# Altium PCB RP2040.PcbDoc
Units mm, origin at the board's own origin, x right, y up, seen from the top; angles counter-clockwise.
Board outline 51.3 x 56.73 mm, 4 copper layers (Top Layer, Layer 1, Layer 2, Bottom Layer), stack 1.587 mm thick; 30 components, 51 nets, 206 pads, 53 vias.
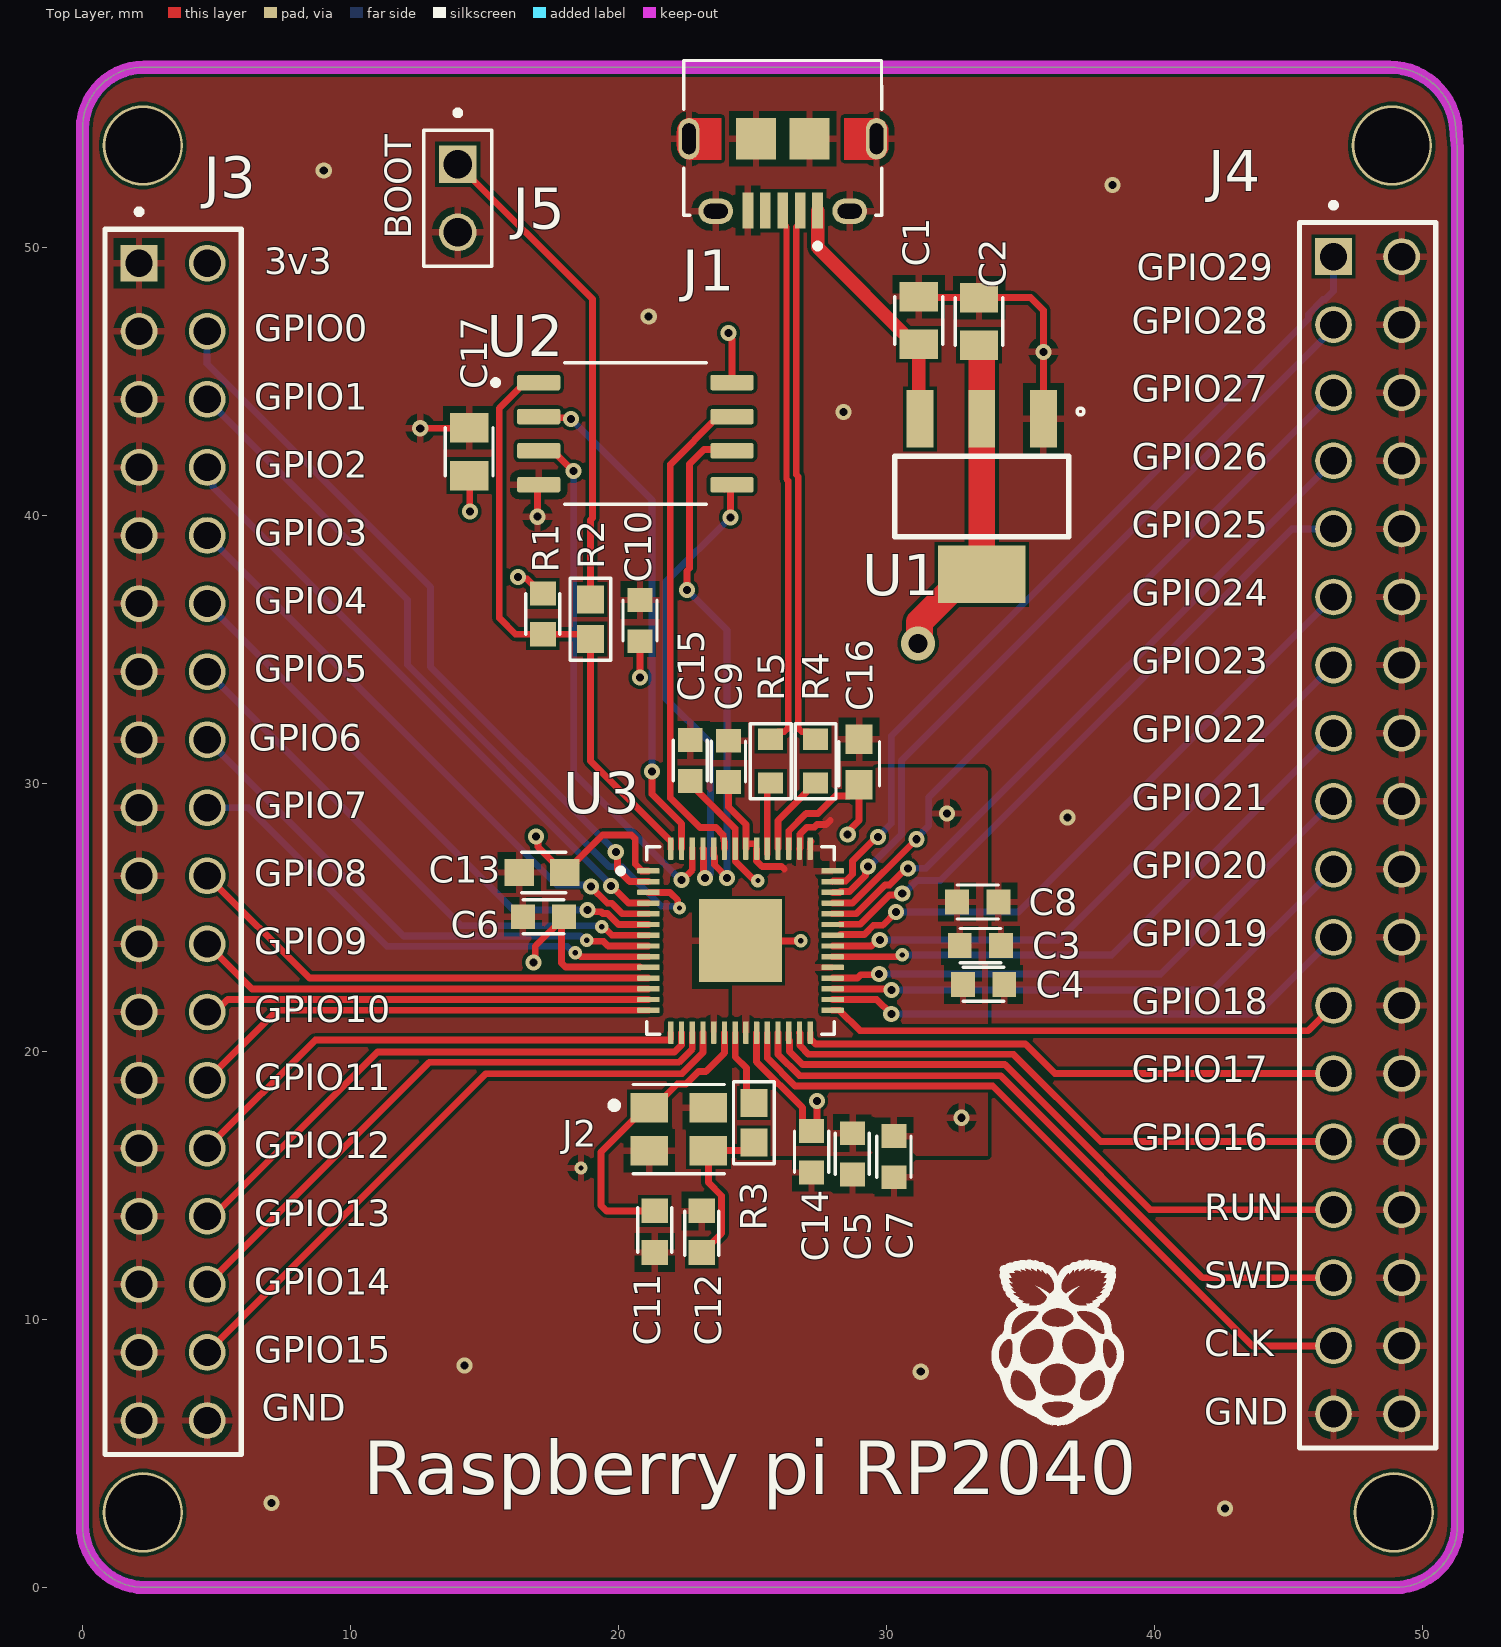
[diagram p0: Top Layer view]
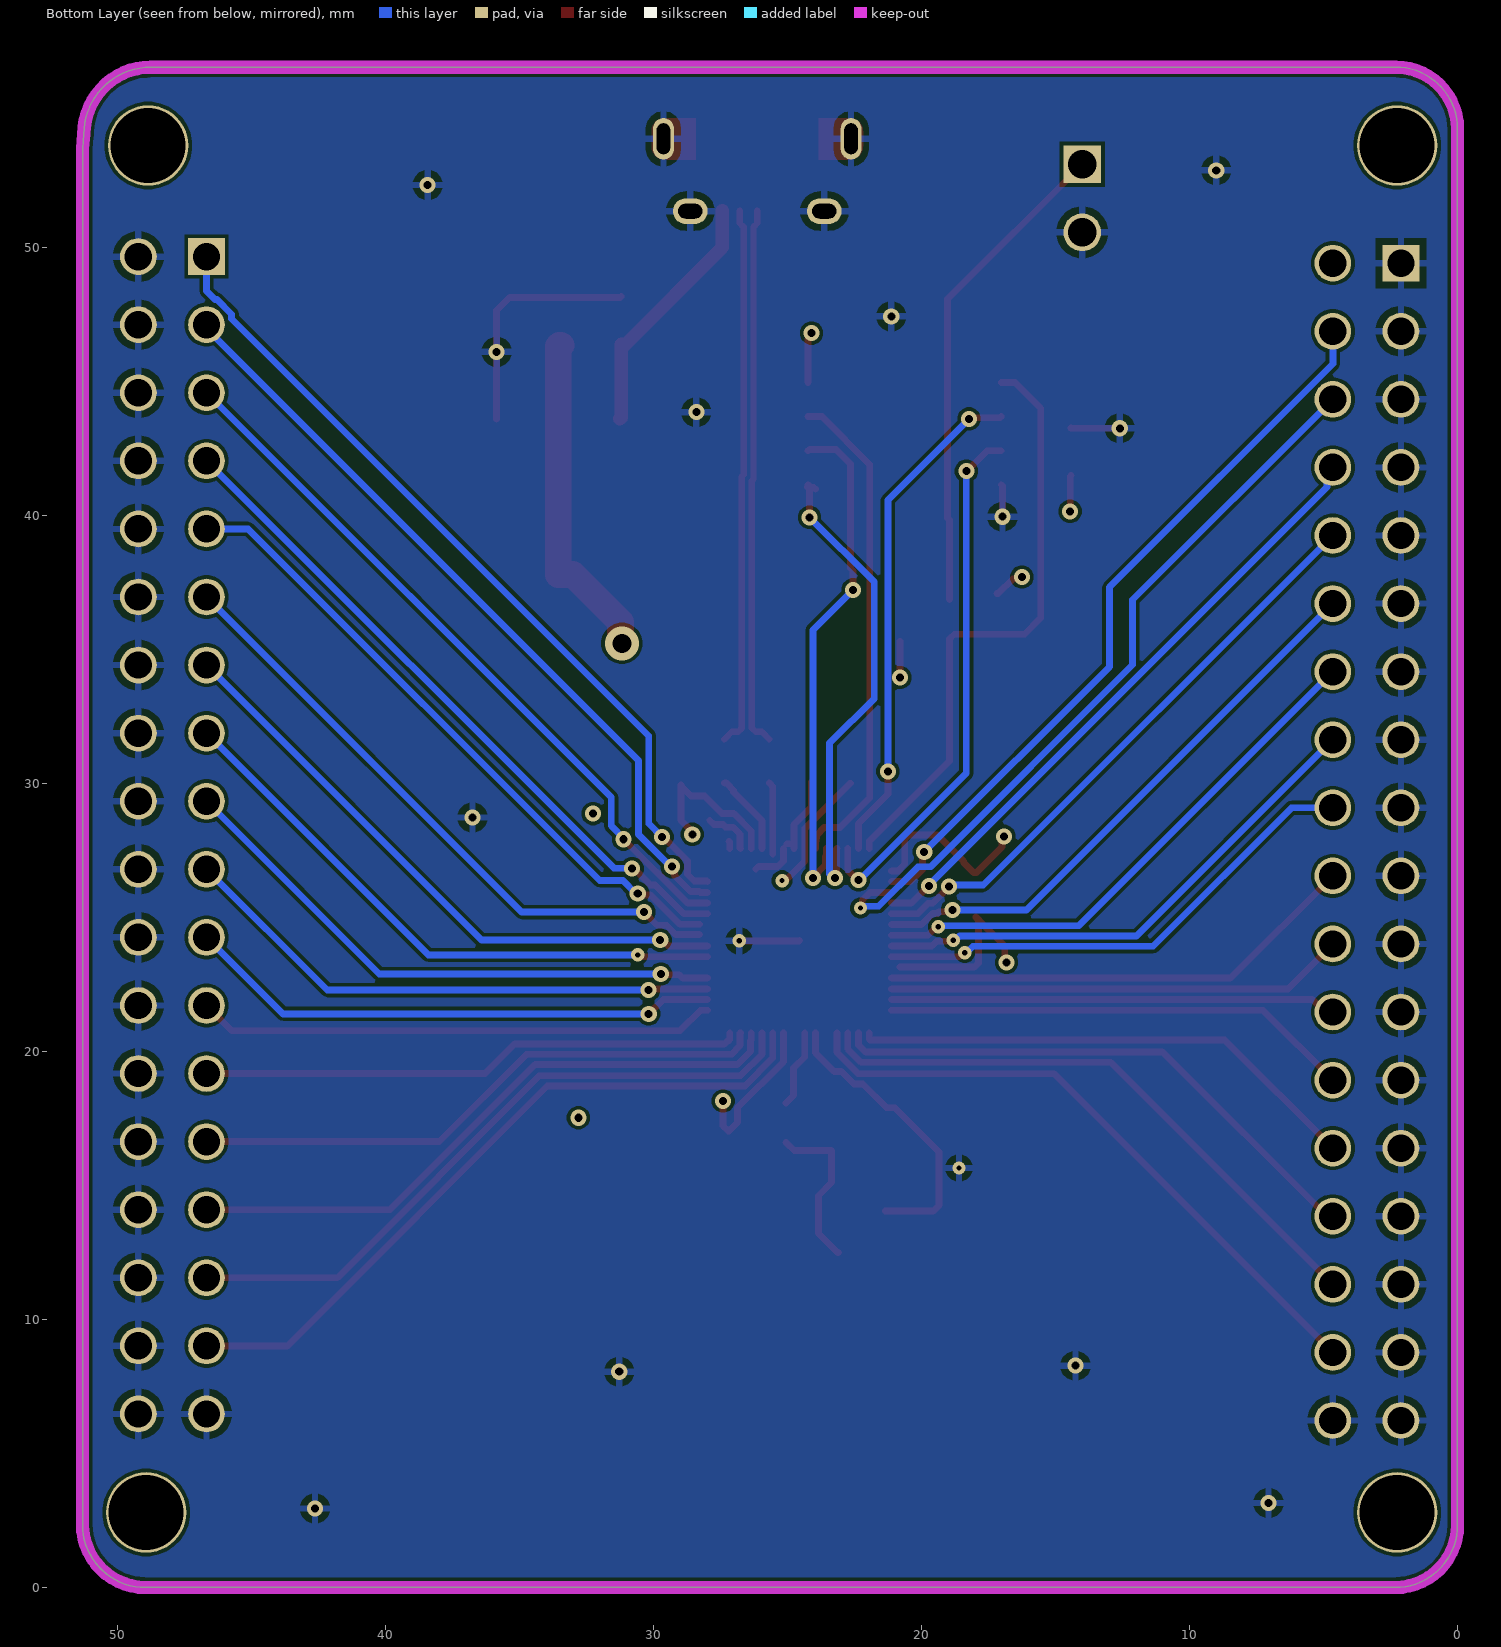
[diagram p1: Bottom Layer view, seen from below]
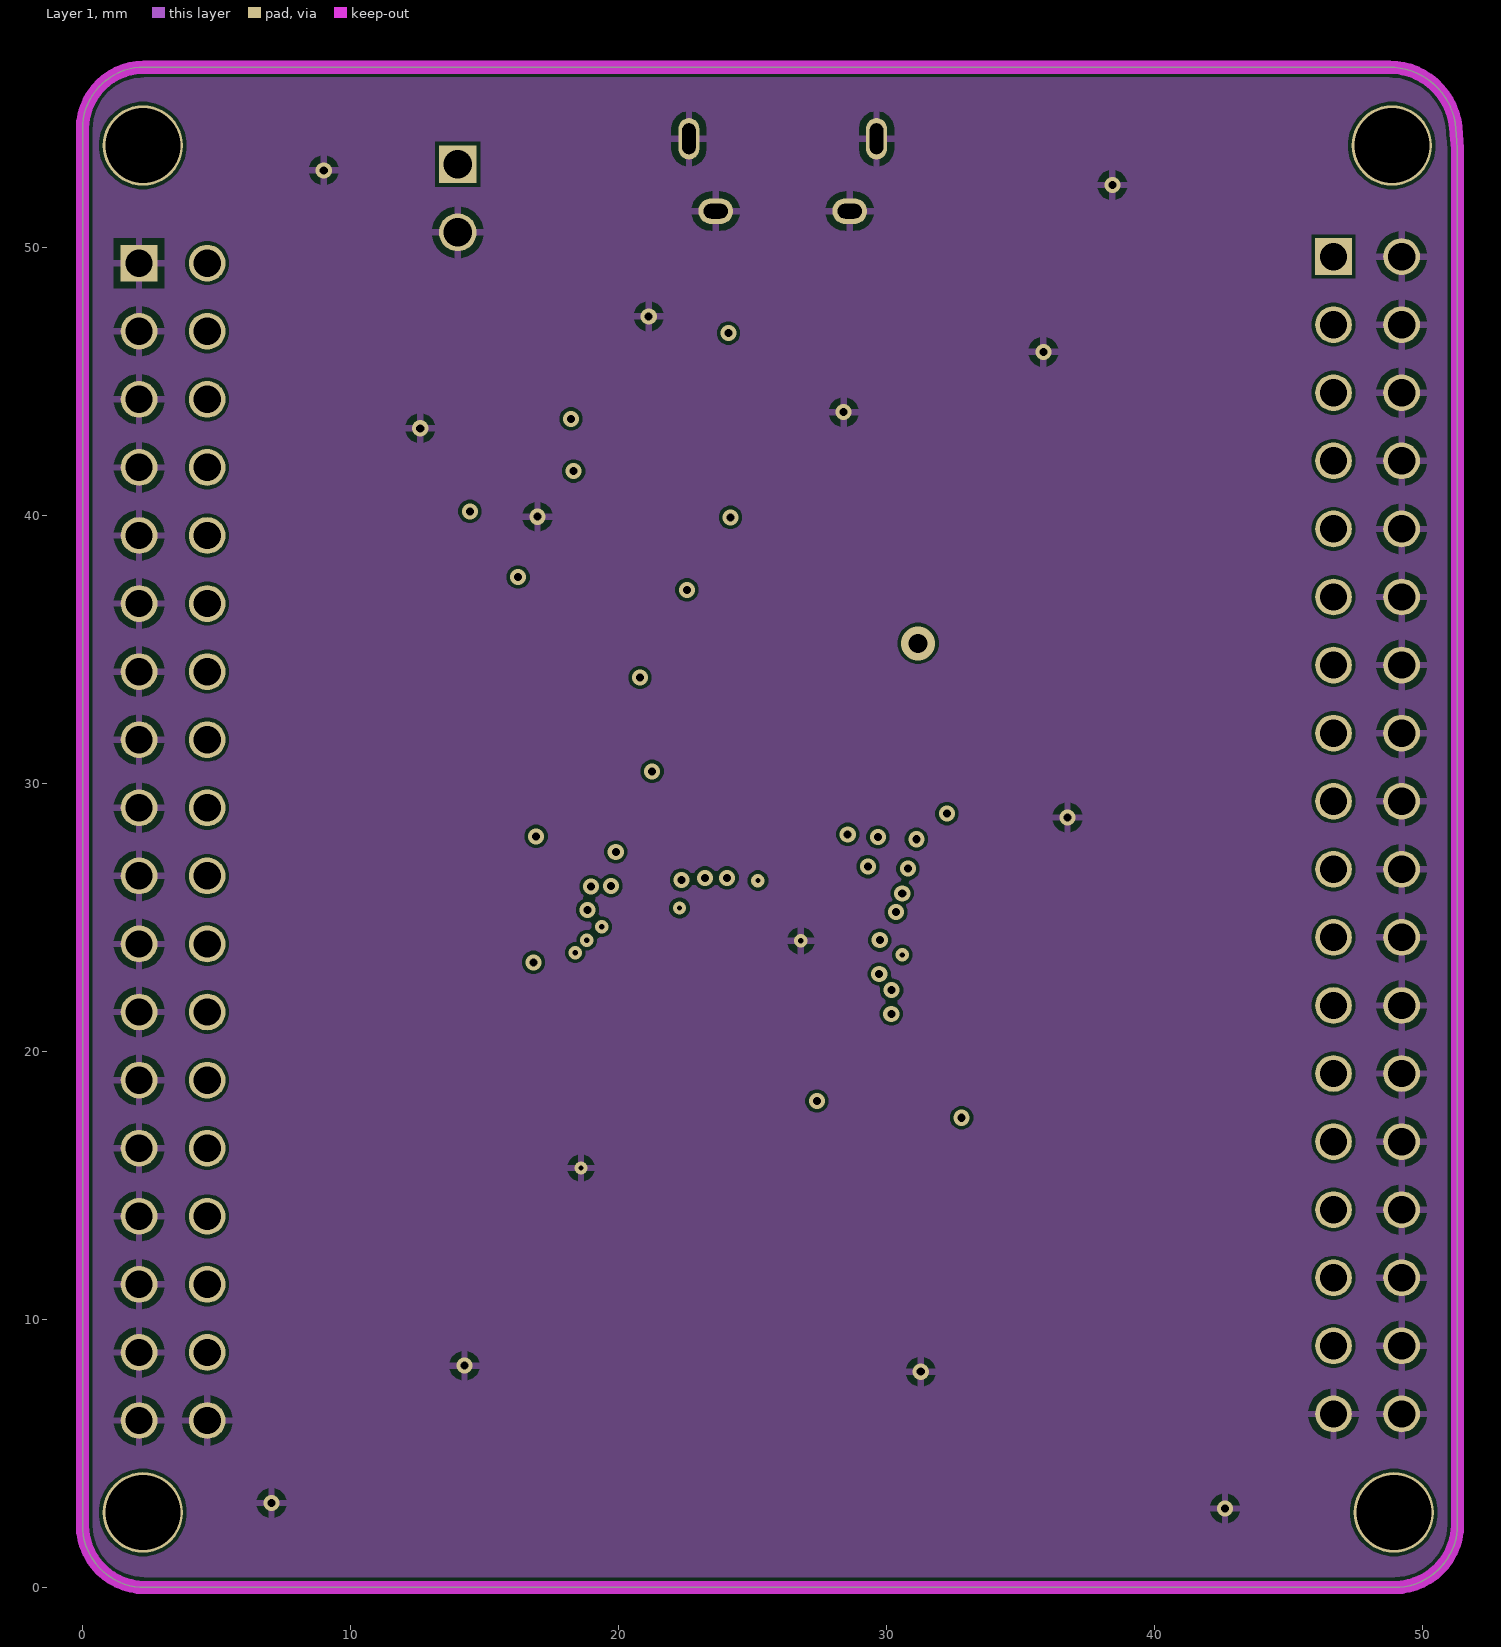
[diagram p2: Layer 1]
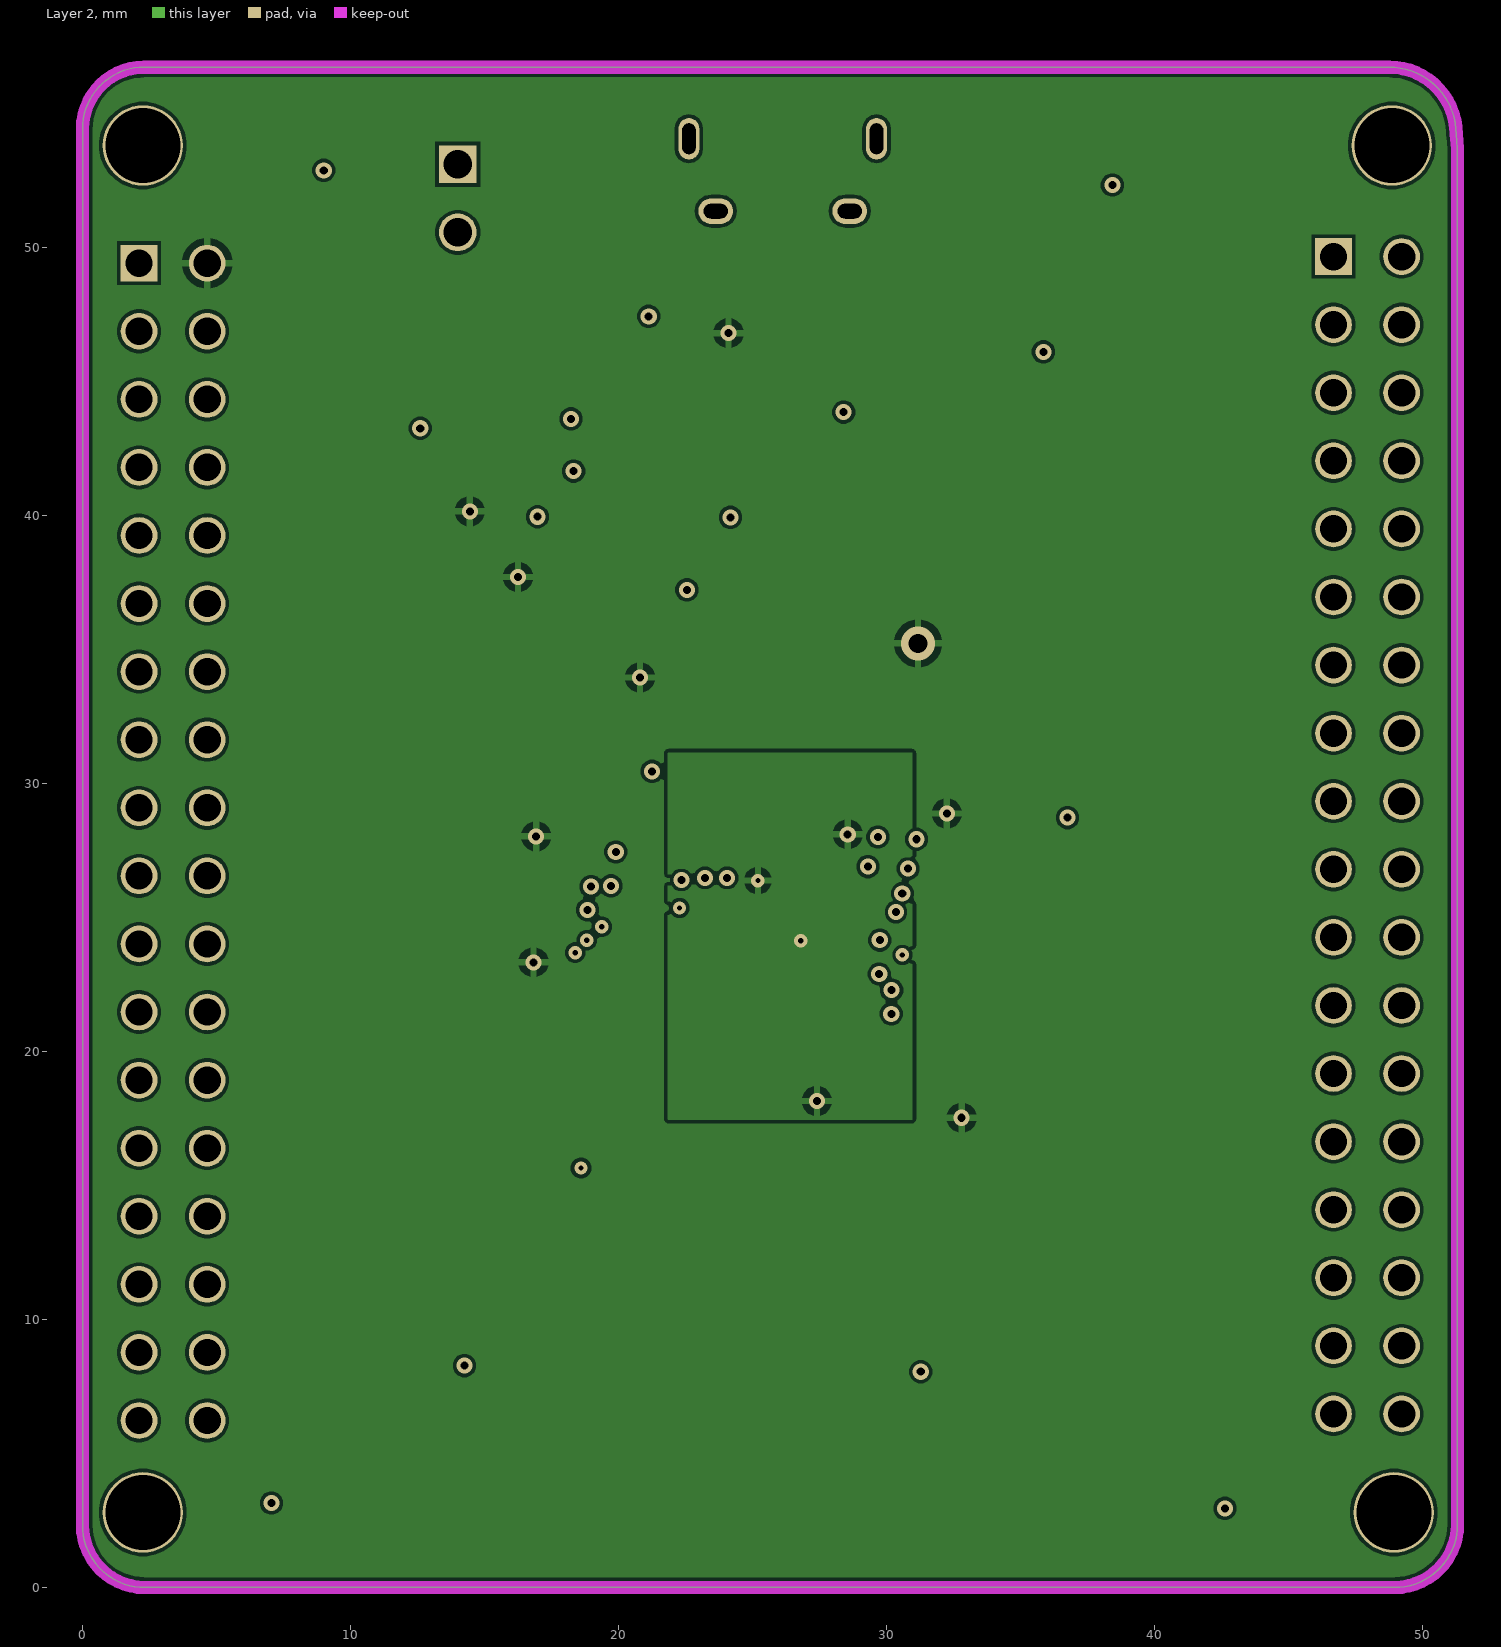
[diagram p3: Layer 2]
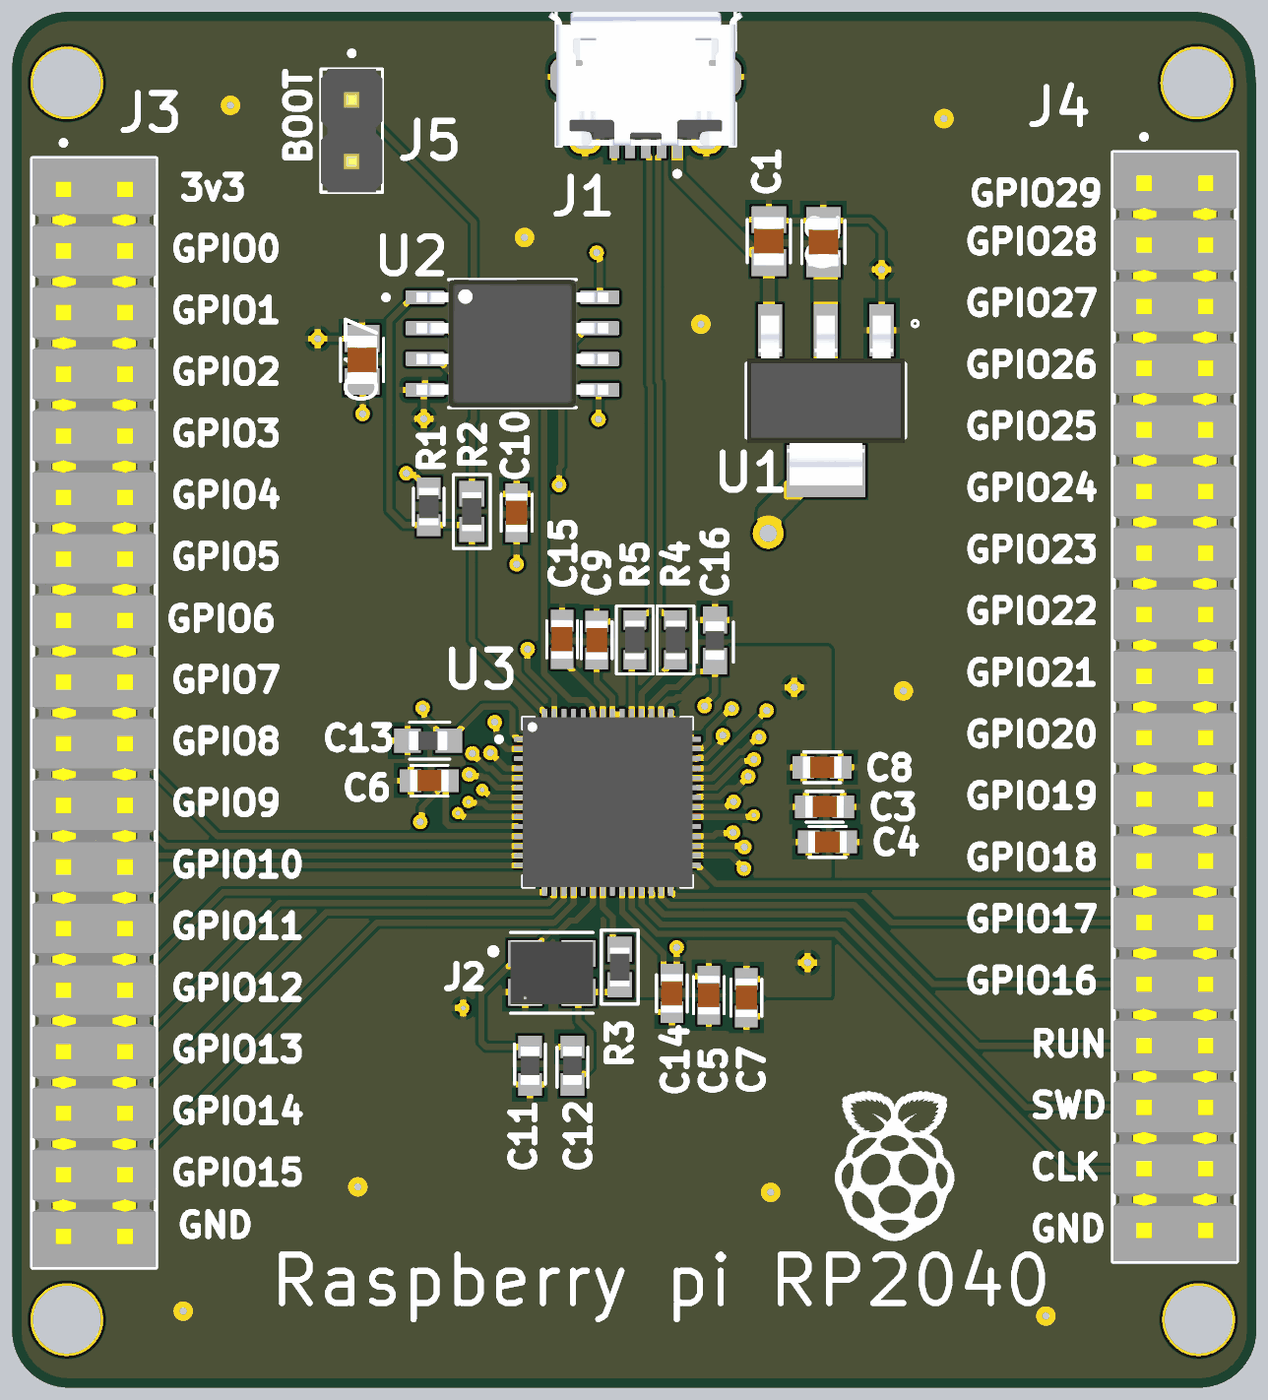
[diagram p4: 3D render of the assembled board from above, using the file's embedded part models]

## Layer stack, top to bottom
Top Solder: solder mask 0.0102, Solder Resist, Dk 3.5
Top Layer: signal copper 0.0356
Dielectric 2: prepreg 0.2104, PP-023, Dk 4.4
Layer 1: signal copper 0.0152
Dielectric 1: dielectric 1.065, FR-4, Dk 4.6
Layer 2: signal copper 0.0152
Dielectric 3: prepreg 0.2104, PP-023, Dk 4.4
Bottom Layer: signal copper 0.0356
Bottom Solder: solder mask 0.0102, Solder Resist, Dk 3.5

## Board outline
51.3,2.825 51.3,2.35 cw(c48.95,2.35) 48.95,0 2.325,0 cw(c2.325,2.325) 0,2.325 0,2.9 0,53.95 0,54.425 cw(c2.3,54.425) 2.3,56.725 48.75,56.725 cw(c48.75,54.225) 51.25,54.225 51.3,53.7

## Design rules (kind name [scope] priority, off if disabled: settings)
Clearance [All] p1: gap=0.127 ignorepadtopadclearanceinfootprint=TRUE
DiffPairsRouting UDiff [InDifferentialPairClass('UDiff')] p1: maxlimit=0.127 minlimit=0.127 mostfreqgap=0.127 toplayer_minwidth=0.242 toplayer_maxwidth=0.242 toplayer_prefwidth=0.242 midlayer1_minwidth=0.154 midlayer1_maxwidth=0.154 midlayer1_prefwidth=0.154 midlayer2_minwidth=0.154 midlayer2_maxwidth=0.154 midlayer2_prefwidth=0.154 bottomlayer_minwidth=0.242 bottomlayer_maxwidth=0.242 bottomlayer_prefwidth=0.242 impedanceprofiledriven=TRUE impedanceprofileid={4DA9A289-3666-44F6-A11D-1AFC5466B2C4} impedanceprofilevalue=90.000000 maxuncoupledlength=12.7
DiffPairsRouting Diff90 [InDifferentialPairClass('Diff90')] p2: maxlimit=0.127 minlimit=0.127 mostfreqgap=0.127 toplayer_minwidth=0.242 toplayer_maxwidth=0.242 toplayer_prefwidth=0.242 bottomlayer_minwidth=0.242 bottomlayer_maxwidth=0.242 bottomlayer_prefwidth=0.242 impedanceprofiledriven=TRUE impedanceprofileid={9129FA07-BEEB-4B5A-855E-41EE754037DE} impedanceprofilevalue=90.000000 maxuncoupledlength=12.7
PolygonConnect [All] p1: connectstyle=Relief reliefconductorwidth=0.254 reliefentries=4 polygonreliefangle="90 Angle" airgapwidth=0.254
RoutingVias [All] p1: holewidth=0.3 width=0.6 viastyle="Through Hole" minholewidth=0.15 minwidth=0.5 maxholewidth=0.711 maxwidth=1.27
SolderMaskExpansion [All] p1: expansion=0.102 istentingtop=FALSE
Width [All] p1: maxlimit=1 minlimit=0.254 preferedwidth=0.254 midlayer1_maxwidth=0.254 midlayer2_maxwidth=0.254 bottomlayer_maxwidth=0.254 minimp=50.000000 maximp=50.000000 favimp=50.000000
29 further rules are at their usual default settings.

## Classes and differential pairs
differential pair class Diff90: D
component class Power_USB: C1 C2 C3 C4 C5 C6 C7 C8 C9 C17 J1 U1
component class MCU: C13 C14 C15 C16 R4 R5 U3
component class "Flash Storage": C10 R1 R2 U2
component class "Crystal Oscillator": C11 C12 J2 R3
component class Conectors: J3 J4 J5
differential pair UD: +UD_P -UD_N
differential pair D: +D_P -D_N

## Components (designator, comment, footprint, x,y, rotation, side; value= is the part's Value field where it differs from the comment)
C1 "10uF" CL21A106KOQNNNG 31.2,47.275 r270 top
C2 "10uF" CL21A106KOQNNNG 33.45,47.237 r270 top
C3 "100nF" CL10B104KB8NNNC 33.5,23.95 r180 top
C4 "100nF" CL10B104KB8NNNC 33.62,22.5 r180 top
C5 "100nF" CL10B104KB8NNNC 28.725,16.18 r90 top
C6 "100nF" CL10B104KB8NNNC 17.2,25.025 r0 top
C7 "100nF" CL10B104KB8NNNC 30.275,16.075 r90 top
C8 "100nF" CL10B104KB8NNNC 33.4,25.575 r180 top
C9 "100nF" CL10B104KB8NNNC 24.1,30.82 r270 top
C10 "100nF" CL10B104KB8NNNC 20.8,36.075 r90 top
C11 "15pF" CC0603JRNPO9BN150 21.35,13.275 r270 top
C12 "15pF" CC0603JRNPO9BN150 23.1,13.275 r90 top
C13 "1uF" CC0603KRX5R8BB105 17.15,26.675 r180 top
C14 "100nF" CL10B104KB8NNNC 27.2,16.255 r90 top
C15 "100nF" CL10B104KB8NNNC 22.675,30.855 r270 top
C16 "1uF" CC0603KRX5R8BB105 28.975,30.8 r90 top
C17 "10uF" CL21A106KOQNNNG 14.425,42.375 r270 top
J1 "usb" AMPHENOL_10118194-0001LF 26.125,54.05 r180 top
J2 "Crystal" ABM8-272-T3 22.25,17.1 r0 top
J3 "pin header" MTSW-118-07-T-D-150 2.11,49.41 r270 top
J4 "pin header" MTSW-118-07-T-D-150 46.675,49.655 r270 top
J5 "THS-02-R" THS-02-R 14,51.83 r270 top
R1 "10k" RMCF0603JT10K0 17.175,36.325 r90 top
R2 "1k" RC0603FR-071KL 18.95,36.125 r270 top
R3 "1k" RC0603FR-071KL 25.05,17.34 r90 top
R4 "27R4" RC0603FR-0727R4L 27.35,30.83 r90 top
R5 "27R4" RC0603FR-0727R4L 25.675,30.83 r90 top
U1 "Regulator" SOT230P700X180-4N 33.55,40.7 r270 top
U2 "flash memory" SOIC127P790X216-8N 20.625,43.05 r0 top
U3 "RP2040" RP2040 24.55,24.135 r0 top

## Footprints (in the part's own frame and the unit in brackets; to place one, negate y for a bottom-side part, rotate by r counter-clockwise, add the part's x,y. Pads: shape width x height; smd on the part's side, far side on the other; paste and mask are expansions set on the pad)
ABM8-272-T3 [mm]
  rect 1.4x1.1 smd: 1(-1.1,0.8) 2(-1.1,-0.8) 3(1.1,-0.8) 4(1.1,0.8)
  silkscreen extent -2.54,-1.66 1.7,1.66, body extent -1.7,-1.35 1.7,1.35, height 0.76
AMPHENOL_10118194-0001LF [mm]
  rect 0.4x1.35 smd: 1(-1.3,2.675) 2(-0.65,2.675) 3(0,2.675) 4(0.65,2.675) 5(1.3,2.675)
  oval 0.775x1.55 hole 0.5 slot 1.15 at 90 deg mask+0: SH1(-3.5,0) SH4(3.5,0)
  rect 1.5x1.55 smd: SH2(1,0) SH3(-1,0)
  oval 1.3x0.95 hole 0.55 slot 0.9 at 0 deg: SH5(-2.5,2.7) SH6(2.5,2.7)
  Top Layer region: 3.471,0.774 3.497,0.772 3.523,0.769 3.549,0.764 3.574,0.758 3.6,0.751 3.624,0.742 3.648,0.732 3.672,0.721 3.695,0.708 3.717,0.694 3.739,0.68 3.76,0.664 3.78,0.647 3.799,0.629 3.817,0.61 3.834,0.59 3.85,0.569 3.864,0.547 3.878,0.525 3.891,0.502 3.902,0.478 3.912,0.454 3.921,0.43 3.928,0.404 3.934,0.379 3.939,0.353 3.942,0.327 3.944,0.301 3.945,0.275 3.945,-0.275 3.944,-0.301 3.942,-0.327 3.939,-0.353 3.934,-0.379 3.928,-0.404 3.921,-0.43 3.912,-0.454 3.902,-0.478 3.891,-0.502 3.878,-0.525 3.864,-0.547 3.85,-0.569 3.834,-0.59 3.817,-0.61 3.799,-0.629 3.78,-0.647 3.76,-0.664 3.739,-0.68 3.717,-0.694 3.695,-0.708 3.672,-0.721 3.648,-0.732 3.624,-0.742 3.6,-0.751 3.574,-0.758 3.549,-0.764 3.523,-0.769 3.497,-0.772 3.471,-0.774 3.445,-0.775 2.3,-0.775 2.3,0.775 3.445,0.775
  Top Layer region: -2.3,-0.775 -3.445,-0.775 -3.471,-0.774 -3.497,-0.772 -3.523,-0.769 -3.549,-0.764 -3.574,-0.758 -3.6,-0.751 -3.624,-0.742 -3.648,-0.732 -3.672,-0.721 -3.695,-0.708 -3.717,-0.694 -3.739,-0.68 -3.76,-0.664 -3.78,-0.647 -3.799,-0.629 -3.817,-0.61 -3.834,-0.59 -3.85,-0.569 -3.864,-0.547 -3.878,-0.525 -3.891,-0.502 -3.902,-0.478 -3.912,-0.454 -3.921,-0.43 -3.928,-0.404 -3.934,-0.379 -3.939,-0.353 -3.942,-0.327 -3.944,-0.301 -3.945,-0.275 -3.945,0.275 -3.944,0.301 -3.942,0.327 -3.939,0.353 -3.934,0.379 -3.928,0.404 -3.921,0.43 -3.912,0.454 -3.902,0.478 -3.891,0.502 -3.878,0.525 -3.864,0.547 -3.85,0.569 -3.834,0.59 -3.817,0.61 -3.799,0.629 -3.78,0.647 -3.76,0.664 -3.739,0.68 -3.717,0.694 -3.695,0.708 -3.672,0.721 -3.648,0.732 -3.624,0.742 -3.6,0.751 -3.574,0.758 -3.549,0.764 -3.523,0.769 -3.497,0.772 -3.471,0.774 -3.445,0.775 -2.3,0.775
  silkscreen extent -3.7,-2.92 3.7,4.1, body extent -4.02,-2.68 4.03,2.85, height 2.73
CC0603JRNPO9BN150 [mm]
  rect 0.92x0.98 smd: 1(-0.775,0) 2(0.775,0)
  silkscreen extent -0.89,-0.64 0.76,0.64, body extent -0.8,-0.4 0.8,0.4, height 0.9
CC0603KRX5R8BB105 [mm]
  rect 1.1x1 smd: 1(-0.85,0) 2(0.85,0)
  silkscreen extent -0.89,-0.76 0.76,0.76, body extent -0.8,-0.4 0.8,0.4, height 0.9
CL10B104KB8NNNC [mm]
  rect 0.89x0.93 smd: 1(-0.77,0) 2(0.77,0)
  silkscreen extent -0.76,-0.64 0.76,0.64, body extent -0.8,-0.45 0.8,0.45, height 0.78
CL21A106KOQNNNG [mm]
  rect 1.1x1.43 smd: 1(-0.888,0) 2(0.888,0)
  silkscreen extent -0.89,-0.89 0.89,0.89, body extent -1,-0.62 1,0.63, height 1.35
MTSW-118-07-T-D-150 [mm]
  rect 1.37x1.37 hole 1.02: 01(0,0)
  round 1.37 hole 1.02: 02(0,2.54) 03(2.54,0) 04(2.54,2.54) 05(5.08,0) 06(5.08,2.54) 07(7.62,0) 08(7.62,2.54) 09(10.16,0) 10(10.16,2.54) 11(12.7,0) 12(12.7,2.54) 13(15.24,0) 14(15.24,2.54) 15(17.78,0) 16(17.78,2.54) 17(20.32,0) 18(20.32,2.54) 19(22.86,0) 20(22.86,2.54) 21(25.4,0) 22(25.4,2.54) 23(27.94,0) 24(27.94,2.54) 25(30.48,0) 26(30.48,2.54) 27(33.02,0) 28(33.02,2.54) 29(35.56,0) 30(35.56,2.54) 31(38.1,0) 32(38.1,2.54) 33(40.64,0) 34(40.64,2.54) 35(43.18,0) 36(43.18,2.54)
  silkscreen extent -2.02,-1.27 44.45,3.81, body extent -1.27,-1.27 44.45,3.81, height 7.11
RC0603FR-071KL [mm]
  rect 1.04x1.02 smd: 1(-0.735,0) 2(0.735,0)
  silkscreen extent -1.52,-0.76 1.52,0.76, body extent -0.8,-0.4 0.8,0.4, height 0.55
RC0603FR-0727R4L [mm]
  rect 0.79x0.93 smd: 1(-0.82,0) 2(0.82,0)
  silkscreen extent -1.4,-0.76 1.4,0.76, body extent -0.8,-0.4 0.8,0.4, height 0.45
RMCF0603JT10K0 [mm]
  rect 0.9x0.97 smd: 1(-0.76,0) 2(0.76,0)
  silkscreen extent -0.76,-0.64 0.76,0.64, body extent -0.77,-0.4 0.78,0.4, height 0.55
RP2040 [mm]
  rrect25% 0.84x0.2 smd: 1(-3.435,2.6) 2(-3.435,2.2) 3(-3.435,1.8) 4(-3.435,1.4) 5(-3.435,1) 6(-3.435,0.6) 7(-3.435,0.2) 8(-3.435,-0.2) 9(-3.435,-0.6) 10(-3.435,-1) 11(-3.435,-1.4) 12(-3.435,-1.8) 13(-3.435,-2.2) 14(-3.435,-2.6) 29(3.435,-2.6) 30(3.435,-2.2) 31(3.435,-1.8) 32(3.435,-1.4) 33(3.435,-1) 34(3.435,-0.6) 35(3.435,-0.2) 36(3.435,0.2) 37(3.435,0.6) 38(3.435,1) 39(3.435,1.4) 40(3.435,1.8) 41(3.435,2.2) 42(3.435,2.6)
  rrect25% 0.2x0.84 smd: 15(-2.6,-3.435) 16(-2.2,-3.435) 17(-1.8,-3.435) 18(-1.4,-3.435) 19(-1,-3.435) 20(-0.6,-3.435) 21(-0.2,-3.435) 22(0.2,-3.435) 23(0.6,-3.435) 24(1,-3.435) 25(1.4,-3.435) 26(1.8,-3.435) 27(2.2,-3.435) 28(2.6,-3.435) 43(2.6,3.435) 44(2.2,3.435) 45(1.8,3.435) 46(1.4,3.435) 47(1,3.435) 48(0.6,3.435) 49(0.2,3.435) 50(-0.2,3.435) 51(-0.6,3.435) 52(-1,3.435) 53(-1.4,3.435) 54(-1.8,3.435) 55(-2.2,3.435) 56(-2.6,3.435)
  rect 3.1x3.1 smd paste-0.57: 57(0,0)
  silkscreen extent -4.57,-3.5 3.5,3.5, body extent -3.5,-3.5 3.5,3.5, height 0.9
SOIC127P790X216-8N [mm]
  rrect25% 1.61x0.58 smd: 1(-3.605,1.905) 2(-3.605,0.635) 3(-3.605,-0.635) 4(-3.605,-1.905) 5(3.605,-1.905) 6(3.605,-0.635) 7(3.605,0.635) 8(3.605,1.905)
  silkscreen extent -5.31,-2.64 2.64,2.64, body extent -3.95,-2.64 3.95,2.64, height 2.16
SOT230P700X180-4N [mm]
  rect 2.15x1 smd: 1(-2.9,2.3) 2(-2.9,0) 3(-2.9,-2.3)
  rect 2.15x3.25 smd: 4(2.9,0)
  silkscreen extent -3.3,-3.25 1.5,3.81, body extent -3.5,-3.25 3.5,3.25, height 1.8
THS-02-R [mm]
  rect 1.41x1.41 hole 1.06: 01(-1.27,0)
  round 1.41 hole 1.06: 02(1.27,0)
  silkscreen extent -3.29,-1.27 2.54,1.27, body extent -2.54,-1.27 2.54,1.27, height 8.54

## Part data
C1 C2 C17: library part CL21A106KOQNNNG, "SMD ceramic capacitor 10µF, tolerance±10% 16V  X5R 0805 _2012 Metric", Package="0805 Samsung", Digi-Key_Part_Number=1276-6455-1-ND, Digi-Key_Purchase_URL=https://www.digikey.com/product-detail/en/samsung-electro-mechanics/CL21A106KOQNNNG/1276-6455-1-ND/5958083?utm_source=snapeda&utm_medium=aggregator&utm_campaign=symbol, MF="Samsung Electro-Mechanics", MP=CL21A106KOQNNNG, SnapEDA_Link=https://www.snapeda.com/parts/CL21A106KOQNNNG/Samsung%20Electro-Mechanics/view-part/3597829/?ref=snap
C3 C4 C5 C6 C7 C8 C9 C10 C14 C15: library part CL10B104KB8NNNC, "SMD ceramic capacitor 0.1µF, tolerance ±10% 50V 0603 _1608 Metric_", Package="0603 Samsung", Availability=Unavailable, MF="Samsung Electro-Mechanics", MP=CL10B104KB8NNNC, Price=None, SnapEDA_Link=https://www.snapeda.com/parts/CL10B104KB8NNNC/Samsung%20Electro-Mechanics/view-part/3598309/?ref=snap
C11 C12: library part CC0603JRNPO9BN150, "15pF ±5% 50V Ceramic Capacitor C0G, NP0 0603 (1608 Metric)", Package="0603 Yageo", Availability=Good, Check_prices=https://www.snapeda.com/parts/CC0603JRNPO9BN150/Yageo/view-part/105570/?ref=eda, MF=Yageo, MP=CC0603JRNPO9BN150, Price=None, Purchase-URL=https://pricing.snapeda.com/search/part/CC0603JRNPO9BN150/?ref=eda, SnapEDA_Link=https://www.snapeda.com/parts/CC0603JRNPO9BN150/Yageo/view-part/105570/?ref=snap
C13 C16: library part CC0603KRX5R8BB105, "SMD ceramic capasitor 1uF", Package="0603 Yageo", Availability=Unavailable, MF=Yageo, MP=CC0603KRX5R8BB105, Price=None, SnapEDA_Link=https://www.snapeda.com/parts/CC0603KRX5R8BB105/Yageo/view-part/1820893/?ref=snap
J1: library part 10118194-0001LF, "Micro USB, Input Output Connectors, B TYPE RECEPTACLE with flange", Package=None, Check_prices=https://www.snapeda.com/parts/10118194-0001LF/Amphenol+FCI/view-part/?ref=eda, MF="Amphenol ICC", MP=10118194-0001LF, SnapEDA_Link=https://www.snapeda.com/parts/10118194-0001LF/Amphenol+FCI/view-part/?ref=snap
J2: library part ABM8-272-T3, "12 MHz  ±30ppm Crystal 10pF 50 Ohms 4-SMD, No Lead", Package="SMD-4 Abracon", Check_prices=https://www.snapeda.com/parts/ABM8-272-T3/Abracon/view-part/?ref=eda, MF=ABRACON, MP=ABM8-272-T3, SnapEDA_Link=https://www.snapeda.com/parts/ABM8-272-T3/Abracon/view-part/?ref=snap
J3 J4: library part MTSW-118-07-T-D-150, "2x18 male pin header", Package=None, Availability=Unavailable, MP=MTSW-118-07-T-D-150, Price=None
J5: "2x1 male pin header", Package=None, Availability=Unavailable, MP=THS-02-R, Price=None
R1: library part RMCF0603JT10K0, "10 kOhms ±5% 0.1W, 1/10W Chip Resistor 0603 (1608 Metric) Automotive AEC-Q200 Thick Film", Package=None, Availability=Unavailable, MP=RMCF0603JT10K0, Price=None
R2 R3: library part RC0603FR-071KL, "1 kOhms ±1% 0.1W, 1/10W Chip Resistor 0603 (1608 Metric) Moisture Resistant Thick Film", Package="0603 Yageo", Check_prices=https://www.snapeda.com/parts/RC0603FR-071KL/Yageo/view-part/?ref=eda, MF=Yageo, MP=RC0603FR-071KL, SnapEDA_Link=https://www.snapeda.com/parts/RC0603FR-071KL/Yageo/view-part/?ref=snap
R4 R5: library part RC0603FR-0727R4L, "RES SMD 27.4 OHM 1% 1/10W 0603", Package=None, Availability=Unavailable, MP=RC0603FR-0727R4L, Price=None
U1: library part NCP1117ST50T3G, "Linear Voltage Regulator IC 1 Output 1A SOT-223", Package="TO-261-4 ON Semiconductor", Availability=Unavailable, MF="ON Semiconductor", MP=NCP1117ST50T3G, Price=None, SnapEDA_Link=https://www.snapeda.com/parts/NCP1117ST50T3G/ON%20Semiconductor/view-part/836318/?ref=snap
U2: library part W25Q128JVSIQ, "FLASH - NOR Memory IC 128Mb (16M x 8) SPI - Quad I/O, QPI, DTR 133 MHz 8-SOIC", Package="SOIC-8 Winbond", Availability="In Stock", Check_prices=https://www.snapeda.com/parts/W25Q128JVSIQ/Winbond+Electronics/view-part/?ref=eda, MF="Winbond Electronics", MP=W25Q128JVSIQ, Price=None, Purchase-URL=https://pricing.snapeda.com/search/part/W25Q128JVSIQ/?ref=eda, SnapEDA_Link=https://www.snapeda.com/parts/W25Q128JVSIQ/Winbond+Electronics/view-part/?ref=snap
U3: "RP2040 chip for Raspberry Pi Pico - ARM® Cortex®-M0+ MCU 32-Bit", Package=None, Check_prices=https://www.snapeda.com/parts/RP2040/Raspberry+Pi/view-part/?ref=eda, MF="Raspberry Pi", MP=RP2040, SnapEDA_Link=https://www.snapeda.com/parts/RP2040/Raspberry+Pi/view-part/?ref=snap

## Free pads (board coordinates)
  round 3 hole 2.8 unplated: 1(2.25,53.8) 2(2.25,2.8) 3(48.925,2.8) 4(48.85,53.8)

## Via types
v1: diameter 0.6, hole 0.3, Top Layer to Bottom Layer, 44 vias
v2: diameter 0.5, hole 0.2, Top Layer to Bottom Layer, 8 vias
v3: diameter 1.27, hole 0.711, Top Layer to Bottom Layer, 1 vias

## Nets (pads, with @x,y where several pads share a name; then routed paths per layer and width w, separated by ;. In a path a pad name is that pad's centre, name@x,y a point inside that pad or via, vN(x,y) a via of type N, cw(c..) or ccw(c..) an arc to the next point about the centre after c; other vN are vias at no path point)
1v: C14.2 C15.2 C16.1 U3.23 U3.45 U3.50 | length 16.5
  Top Layer w0.254: C15.2@22.65,30.005 22.67,30.005 24.35,28.325 24.35,27.105 25.014,26.441 25.134,26.441 v2(25.2,26.375) ; U3.23 25.15,19.613 26.862,17.901 26.862,17.343 27.18,17.025 C14.2 27.4,17.225 v1(27.4,18.15) ; U3.45 26.35,28.226 27,28.877 27.436,28.877 28.086,29.527 28.602,29.527 C16.1@28.975,29.9 ; v1(28.55,28.1) 28.55,28.194 28.975,28.619 C16.1@28.975,29.9 ; C16.1 C16.1@28.975,29.9
3v3: C2.2 C3.2 C4.2 C5.2 C6.2 C7.2 C8.2 C9.2 C10.1 C13.1 C17.2 J3.02 R1.2 U1.2 U1.4 U2.8 U3.1 U3.10 U3.22 U3.33 U3.42 U3.43 U3.44 U3.48 U3.49 | length 38.7
  Top Layer w0.254: C17.2 14.45,41.462 v1(14.45,40.15) ; v1(16.25,37.7) 16.316,37.634 16.591,37.634 17.14,37.085 R1.2 ; v1(16.825,23.325) 16.891,23.391 16.891,23.926 C6.2@17.875,24.91 ; v1(16.925,28.025) 16.991,27.959 16.991,27.634 17.95,26.675 C13.1 18.05,26.675 18.423,27.048 18.423,27.098 19.4,28.075 20.476,28.075 20.625,27.926 20.625,26.984 20.795,26.814 20.795,26.789 20.849,26.735 U3.1 ; C6.2@17.97,25.005 C6.2@17.875,24.91 ; C6.2 17.875,24.93 C6.2@17.875,24.91 ; U3.10@20.8,23.154 18.024,23.154 17.875,23.303 C6.2@17.875,24.91 ; v1(20.8,33.95) C10.1 ; C9.2 24.1,29.114 24.75,28.464 U3.49@24.75,27.723 ; v1(24.1,46.8) 24.1,46.706 24.23,46.576 U2.8 ; U3.49 U3.49@24.75,27.723 ; 25.025,27.75 24.777,27.75 U3.49@24.75,27.723 ; U3.48 25.15,27.105 25.359,26.896 26.084,26.896 26.183,26.797 ; U3.44 26.769,27.589 26.769,28.106 27.029,28.366 27.309,28.366 27.408,28.465 27.74,28.465 27.9,28.625 ; U3.43 27.15,27.811 U3.43@27.177,27.838
  Top Layer w1: v3(31.175,35.225) 31.227,35.277 31.227,36.027 33,37.8 U1.4 U1.2 33.55,46.299 33.5,46.349 C2.2
  other v1: 32.8,17.525 32.25,28.875
CLK: J4.33 U3.24 | length 26.5
  Top Layer w0.254: U3.24 25.55,19.751 26.587,18.714 33.961,18.714 43.66,9.015 J4.33
D_N: J1.2 R4.2 | length 20.2
  Top Layer w0.242: J1.2 26.775,50.9 26.635,50.759 26.635,41.512 26.697,41.45 26.697,32.066 26.839,31.924 27.076,31.924 R4.2
D_P: J1.3 R5.2 | length 20.2
  Top Layer w0.242: R5.2 25.949,31.924 26.186,31.924 26.328,32.066 26.328,41.297 26.265,41.359 26.265,50.759 26.125,50.9 J1.3
GND: C1.1 C2.1 C3.1 C4.1 C5.1 C6.1 C7.1 C8.1 C9.1 C10.2 C11.2 C12.2 C13.2 C14.1 C15.1 C16.2 C17.1 J1.5 J1.SH1 J1.SH2 J1.SH3 J1.SH4 J1.SH5 J1.SH6 J2.2 J2.4 J3.01 J3.03 J3.05 J3.07 J3.09 J3.11 J3.13 J3.15 J3.17 J3.19 J3.21 J3.23 J3.25 J3.27 J3.29 J3.31 J3.33 J3.35 J3.36 J4.02 J4.04 J4.06 J4.08 J4.10 J4.12 J4.14 J4.16 J4.18 J4.20 J4.22 J4.24 J4.26 J4.28 J4.30 J4.32 J4.34 J4.35 J4.36 J5.02 U1.1 U2.4 U3.19 U3.57 | length 14.2
  Top Layer w0.254: v1(12.6,43.25) 14.412,43.25 C17.1 ; v1(16.975,39.95) 16.975,41.1 U2.4 ; U3.57 24.56,24.125 v2(26.8,24.125) ; C1.1 31.238,48.125 C2.1 35.375,48.125 35.449,48.051 35.85,47.65 v1(35.85,46.1) U1.1
  other v1: 42.625,2.95 7.05,3.15 31.275,8.05 14.25,8.275 36.75,28.725 28.4,43.85 21.125,47.425 38.425,52.325 9,52.875
  other v2: 18.6,15.65
GPIO0: J3.04 U3.2 | length 27.8
  Top Layer w0.254: v1(19.896,27.442) 19.962,27.376 19.962,26.788 20.415,26.335 U3.2
  Bottom Layer w0.254: J3.04 4.65,45.658 12.986,37.322 12.986,34.351 v1(19.896,27.442)
GPIO1: J3.06 U3.3 | length 28.4
  Top Layer w0.254: U3.3 21.916,25.935 22.209,25.642 22.209,25.416 v2(22.275,25.35)
  Bottom Layer w0.254: J3.06 12.128,36.852 12.128,34.426 19.667,26.888 20.136,26.888 21.607,25.416 22.209,25.416 v2(22.275,25.35)
GPIO2: J3.08 U3.4 | length 23.5
  Top Layer w0.254: v1(19.717,26.174) 19.733,26.174 20.373,25.535 U3.4
  Bottom Layer w0.254: J3.08 4.864,41.576 4.864,41.061 19.717,26.208 v1(19.717,26.174)
GPIO3: J3.10 U3.5 | length 22.3
  Top Layer w0.254: v1(18.976,26.148) 18.976,26.132 19.577,25.531 19.744,25.531 20.14,25.135 U3.5
  Bottom Layer w0.254: J3.10 17.693,26.207 18.917,26.207 v1(18.976,26.148)
GPIO4: J3.12 U3.6 | length 21.4
  Top Layer w0.254: v1(18.842,25.279) 18.908,25.213 19.344,25.213 19.407,25.15 19.586,25.15 19.955,24.781 20.002,24.735 U3.6
  Bottom Layer w0.254: J3.12 16.081,25.279 v1(18.842,25.279)
GPIO5: J3.14 U3.7 | length 20.5
  Top Layer w0.254: v2(19.376,24.647) 19.441,24.647 19.753,24.335 U3.7
  Bottom Layer w0.254: J3.14 14.133,24.687 19.336,24.687 v2(19.376,24.647)
GPIO6: J3.16 U3.8 | length 19.7
  Top Layer w0.254: v2(18.809,24.144) 18.845,24.108 19.44,24.108 19.614,23.935 U3.8
  Bottom Layer w0.254: J3.16 11.974,24.306 18.581,24.306 18.743,24.144 v2(18.809,24.144)
GPIO7: J3.18 U3.9 | length 18.8
  Top Layer w0.254: v2(18.379,23.688) 18.446,23.688 18.598,23.535 U3.9
  Bottom Layer w0.254: J3.18 6.191,29.09 11.356,23.925 18.082,23.925 18.319,23.688 v2(18.379,23.688)
GPIO8: J3.20 U3.11 | length 18
  Top Layer w0.254: J3.20 8.465,22.735 U3.11
GPIO9: J3.22 U3.12 | length 17.2
  Top Layer w0.254: J3.22 6.325,22.335 U3.12
GPIO10: J3.24 U3.13 | length 16.7
  Top Layer w0.254: J3.24 4.952,21.47 5.417,21.935 U3.13
GPIO11: J3.26 U3.14 | length 17.5
  Top Layer w0.254: J3.26 7.255,21.535 U3.14
GPIO12: J3.28 U3.15 | length 19.2
  Top Layer w0.254: J3.28 8.685,20.425 21.923,20.425 21.95,20.452 U3.15
GPIO13: J3.30 U3.16 | length 20.8
  Top Layer w0.254: J3.30 4.875,13.85 11.002,19.977 22.091,19.977 22.35,20.235 U3.16
GPIO14: J3.32 U3.17 | length 22.3
  Top Layer w0.254: J3.32 12.936,19.596 22.249,19.596 22.75,20.097 U3.17
GPIO15: J3.34 U3.18 | length 23.9
  Top Layer w0.254: J3.34 15.051,19.171 22.363,19.171 23.15,19.958 U3.18
GPIO16: J4.27 U3.27 | length 21.9
  Top Layer w0.254: U3.27 26.769,20.681 26.769,20.216 27.091,19.894 34.731,19.894 37.99,16.635 J4.27
GPIO17: J4.25 U3.28 | length 20.3
  Top Layer w0.254: U3.28 27.15,20.434 27.177,20.407 27.217,20.407 27.349,20.275 35.175,20.275 36.275,19.175 J4.25
GPIO18: J4.23 U3.29 | length 19.4
  Top Layer w0.254: U3.29 28.251,21.535 29.011,20.775 45.735,20.775 J4.23
GPIO19: J4.21 U3.30 | length 20.1
  Top Layer w0.254: U3.30 27.993,21.943 29.632,21.943 v1(30.175,21.4)
  Bottom Layer w0.254: v1(30.175,21.4) 43.82,21.4 J4.21
GPIO20: J4.19 U3.31 | length 20.6
  Top Layer w0.254: U3.31 30.144,22.335 v1(30.19,22.29)
  Bottom Layer w0.254: v1(30.19,22.29) 42.17,22.29 J4.19
GPIO21: J4.17 U3.32 | length 21.4
  Top Layer w0.254: U3.32 28.917,22.735 29.044,22.862 29.698,22.862 v1(29.725,22.889)
  Bottom Layer w0.254: v1(29.725,22.889) 40.229,22.889 J4.17
GPIO22: J4.15 U3.34 | length 22.1
  Top Layer w0.254: U3.34 30.523,23.535 v2(30.588,23.6)
  Bottom Layer w0.254: v2(30.588,23.6) 38.4,23.6 J4.15
GPIO23: J4.13 U3.35 | length 23
  Top Layer w0.254: U3.35 29.433,23.935 29.652,24.154 v1(29.746,24.154)
  Bottom Layer w0.254: v1(29.746,24.154) 36.414,24.154 J4.13
GPIO24: J4.11 U3.36 | length 23.6
  Top Layer w0.254: U3.36@28.278,24.362 29.171,24.362 29.517,24.708 29.858,24.708 v1(30.35,25.2)
  Bottom Layer w0.254: v1(30.35,25.2) 34.92,25.2 J4.11
GPIO25: J4.09 U3.37 | length 24.5
  Top Layer w0.254: U3.37@28.278,24.743 29.013,24.743 30.104,25.834 30.519,25.834 v1(30.585,25.9)
  Bottom Layer w0.254: v1(30.585,25.9) 30.659,25.9 31.136,26.377 32.002,26.377 45.12,39.495 J4.09
GPIO26: J4.07 U3.38 | length 25.7
  Top Layer w0.254: U3.38 28.866,25.135 29.946,26.215 30.116,26.215 30.721,26.82 v1(30.796,26.82)
  Bottom Layer w0.254: v1(30.796,26.82) 30.812,26.837 31.477,26.837 J4.07
GPIO27: J4.05 U3.39 | length 27.2
  Top Layer w0.254: U3.39 28.727,25.535 v1(31.109,27.916)
  Bottom Layer w0.254: v1(31.109,27.916) 31.109,27.954 31.571,28.417 31.571,29.471 J4.05
GPIO28: J4.03 U3.40 | length 29.3
  Top Layer w0.254: U3.40 28.251,25.935 28.278,25.962 28.615,25.962 29.213,26.56 29.213,26.711 29.304,26.802 v1(29.304,26.896)
  Bottom Layer w0.254: v1(29.304,26.896) 29.354,26.896 30.555,28.096 30.555,30.855 46.675,46.975 J4.03
GPIO29: J4.01 U3.41 | length 31.4
  Top Layer w0.254: U3.41 28.012,26.362 28.477,26.362 28.725,26.611 28.725,27.1 29.625,28 v1(29.675,28)
  Bottom Layer w0.254: v1(29.675,28) 30.174,28.499 30.174,31.774 45.736,47.336 45.736,47.504 46.286,48.054 46.354,48.054 46.675,48.375 J4.01
QSPI_CSN: R1.1 R2.2 U2.1 U3.56 | length 22.5
  Top Layer w0.254: U2.1 16.505,44.955 15.55,44 15.55,36.175 16.16,35.565 R1.1 18.775,35.565 R2.2 18.95,30.836 21.95,27.836 U3.56
QSPI_SCLK: U2.6 U3.52 | length 19.2
  Top Layer w0.254: v1(22.55,37.221) 22.55,37.929 22.65,38.029 22.65,41.92 23.193,42.463 24.182,42.463 U2.6 ; U3.52 23.55,27.304 23.577,27.277 23.577,26.965 24.05,26.492 v1(24.05,26.475)
  Bottom Layer w0.254: v1(22.55,37.221) 24.05,35.721 v1(24.05,26.475)
QSPI_SD0: U2.5 U3.53 | length 18
  Top Layer w0.254: U3.53 23.169,27.551 23.169,26.531 v1(23.225,26.475) ; U2.5@23.95,40.982 24.018,41.05 U2.5@24.175,41.05 ; v1(24.175,39.925) U2.5@24.175,41.05 ; U2.5 24.175,41.09 U2.5@24.175,41.05 ; U2.5@24.25,41.05 U2.5@24.175,41.05
  Bottom Layer w0.254: v1(23.225,26.475) 23.276,26.475 23.425,26.624 23.425,31.505 21.759,33.171 21.759,37.509 v1(24.175,39.925)
QSPI_SD1: U2.2 U3.55 | length 19
  Top Layer w0.254: U2.2 17.063,43.642 18.183,43.642 v1(18.225,43.6) ; v1(21.25,30.45) 21.25,29.597 22.35,28.497 U3.55
  Bottom Layer w0.254: v1(18.225,43.6) 21.25,40.575 v1(21.25,30.45)
QSPI_SD2: U2.3 U3.54 | length 19.9
  Top Layer w0.254: U2.3 17.535,42.415 18.3,41.65 v1(18.325,41.65) ; v1(22.347,26.396) 22.371,26.396 22.75,26.775 U3.54
  Bottom Layer w0.254: v1(18.325,41.65) 18.325,30.383 22.313,26.396 v1(22.347,26.396)
QSPI_SD3: U2.7 U3.51 | length 18.6
  Top Layer w0.254: U3.51 23.95,27.836 23.923,27.863 23.923,27.961 23.904,27.98 23.904,28.081 23.635,28.35 23.036,28.35 21.931,29.455 21.931,30.308 21.931,41.901 23.715,43.685 U2.7
RUN: J4.29 U3.26 | length 23.5
  Top Layer w0.254: U3.26 26.35,20.434 26.377,20.407 26.377,20.002 26.866,19.513 34.412,19.513 39.83,14.095 J4.29
SWD: J4.31 U3.25 | length 25
  Top Layer w0.254: U3.25 25.95,19.89 26.745,19.095 34.255,19.095 41.795,11.555 J4.31
UD_N: R4.1 U3.46 | length 3.1
  Top Layer w0.254: U3.46 25.95,28.61 27.012,29.672 27.012,29.742 27.28,30.01 R4.1
UD_P: R5.1 U3.47 | length 2.7
  Top Layer w0.254: U3.47@25.55,27.367 25.55,29.885 R5.1
USB_BOOT: J5.01 R2.1 | length 18.4
  Top Layer w0.254: J5.01 19.029,48.071 19.029,39.906 18.95,39.827 R2.1
VCC: C1.2 J1.1 U1.3 | length 9.5
  Top Layer w0.5: J1.1 27.425,49.997 31.035,46.387 C1.2 31.2,43.65 U1.3
XIN: C11.1 J2.1 U3.20 | length 11
  Top Layer w0.254: C11.1 19.55,14.05 19.35,14.25 19.35,16.25 21,17.9 J2.1 21.3,17.9 22.19,18.79 22.521,18.79 22.987,19.256 23.256,19.256 23.95,19.95 U3.20
XOUT: R3.2 U3.21 | length 2.9
  Top Layer w0.254: U3.21 24.35,19.801 24.769,19.382 24.769,18.356 R3.2
XOUT: C12.1 J2.3 R3.1 | length 6.2
  Top Layer w0.254: C12.1 23.13,12.5 23.844,13.214 23.844,14.615 23.35,15.109 J2.3 24.745,16.3 R3.1
pads on no net: J1.4

## Polygon pours and split planes (outlines as drawn)
3v3 on Layer 2 "3V3_L03_P015" (solid, remove dead copper, pour order 15): 44.8,0.05 2.515,0.05 cw(c2.515,2.59) -0.025,2.59 -0.025,54.185 cw(c2.515,54.185) 2.515,56.725 48.76,56.725 cw(c48.76,54.185) 51.3,54.185 51.3,2.565 cw(c48.76,2.565) 48.76,0.025 44.8,0.025
1v on Layer 2 "1V_L03_P013" (solid, remove dead copper, pour order 13): 21.838,17.45 21.838,31.15 30.963,31.15 30.963,17.45
GND on Top Layer "GND_L01_P020" (solid, remove dead copper, pour order 20): 44.8,0.05 2.515,0.05 cw(c2.515,2.59) -0.025,2.59 -0.025,54.185 cw(c2.515,54.185) 2.515,56.725 48.76,56.725 cw(c48.76,54.185) 51.3,54.185 51.3,2.565 cw(c48.76,2.565) 48.76,0.025 44.8,0.025
3v3 on Top Layer "3V3_L01_P019" (solid, remove dead copper, pour order 19): 33.775,30.575 24.25,30.575 24.25,16.1 33.775,16.1 33.775,29.15
GND on Layer 1 "GND_L02_P014" (solid, remove dead copper, pour order 14): 44.8,0.05 2.515,0.05 cw(c2.515,2.59) -0.025,2.59 -0.025,54.185 cw(c2.515,54.185) 2.515,56.725 48.76,56.725 cw(c48.76,54.185) 51.3,54.185 51.3,2.565 cw(c48.76,2.565) 48.76,0.025 44.8,0.025
GND on Bottom Layer "GND_L04_P021" (solid, remove dead copper, pour order 21): 44.8,0.05 2.515,0.05 cw(c2.515,2.59) -0.025,2.59 -0.025,54.185 cw(c2.515,54.185) 2.515,56.725 48.76,56.725 cw(c48.76,54.185) 51.3,54.185 51.3,2.565 cw(c48.76,2.565) 48.76,0.025 44.8,0.025

## Keep-outs
Keep-Out Layer:
  the board outline again, w0.5

## Silkscreen, mask and mechanical layers (free items; w line width, h text height)
Top Overlay:
  region: 4780 vertices and 14 holes, not listed, extent 33.919,6.042 38.856,12.233
  text "BOOT" at 12.271,50.329 h1 r90
  text "3v3" at 6.779,49.004 h1
  text "GPIO29" at 39.329,48.779 h1
  text "GPIO28" at 39.154,46.784 h1
  text "GPIO0" at 6.404,46.489 h1
  text "GPIO27" at 39.154,44.244 h1
  text "GPIO1" at 6.404,43.949 h1
  text "GPIO26" at 39.154,41.704 h1
  text "GPIO2" at 6.404,41.409 h1
  text "GPIO25" at 39.154,39.164 h1
  text "GPIO3" at 6.404,38.869 h1
  text "GPIO24" at 39.154,36.624 h1
  text "GPIO4" at 6.404,36.329 h1
  text "GPIO23" at 39.154,34.084 h1
  text "GPIO5" at 6.404,33.789 h1
  text "GPIO22" at 39.154,31.544 h1
  text "GPIO6" at 6.204,31.224 h1
  text "GPIO21" at 39.154,29.004 h1
  text "GPIO7" at 6.404,28.709 h1
  text "GPIO20" at 39.154,26.464 h1
  text "GPIO8" at 6.404,26.169 h1
  text "GPIO19" at 39.154,23.924 h1
  text "GPIO9" at 6.404,23.629 h1
  text "GPIO18" at 39.154,21.384 h1
  text "GPIO10" at 6.404,21.089 h1
  text "GPIO17" at 39.154,18.844 h1
  text "GPIO11" at 6.404,18.549 h1
  text "GPIO16" at 39.154,16.304 h1
  text "GPIO12" at 6.404,16.009 h1
  text "RUN" at 41.854,13.699 h1
  text "GPIO13" at 6.404,13.469 h1
  text "SWD" at 41.854,11.159 h1
  text "GPIO14" at 6.404,10.929 h1
  text "CLK" at 41.854,8.619 h1
  text "GPIO15" at 6.404,8.389 h1
  text "GND" at 6.679,6.229 h1
  text "GND" at 41.854,6.079 h1
  text "Raspberry pi RP2040" at 10.479,3.471 h2